# Altium PCB ProtoStack_H750VBT_altium.PcbDoc
Units mil, origin at the board's own origin, x right, y up, seen from the top; angles counter-clockwise.
Board outline 1259.84 x 4409.45 mil, 3 copper layers (Top Layer, Mid-Layer 2, Bottom Layer); 3 components, 86 nets, 186 pads, 18 vias.
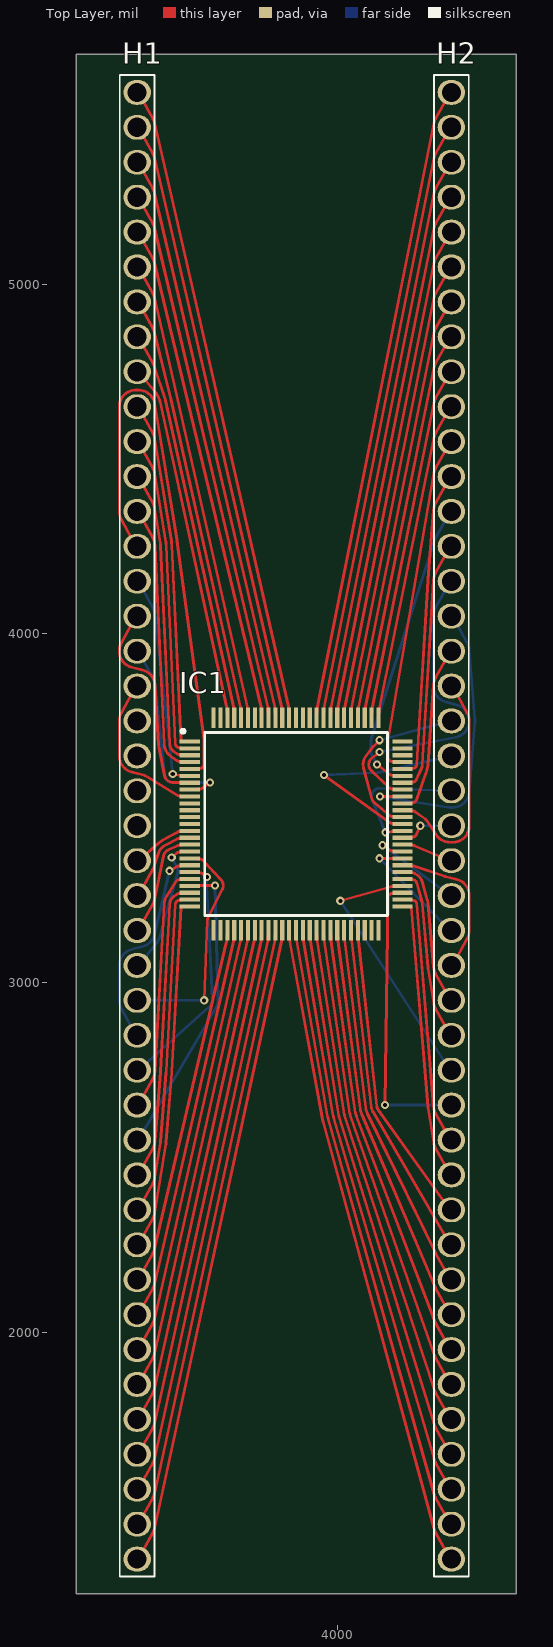
[diagram p0: Top Layer view]
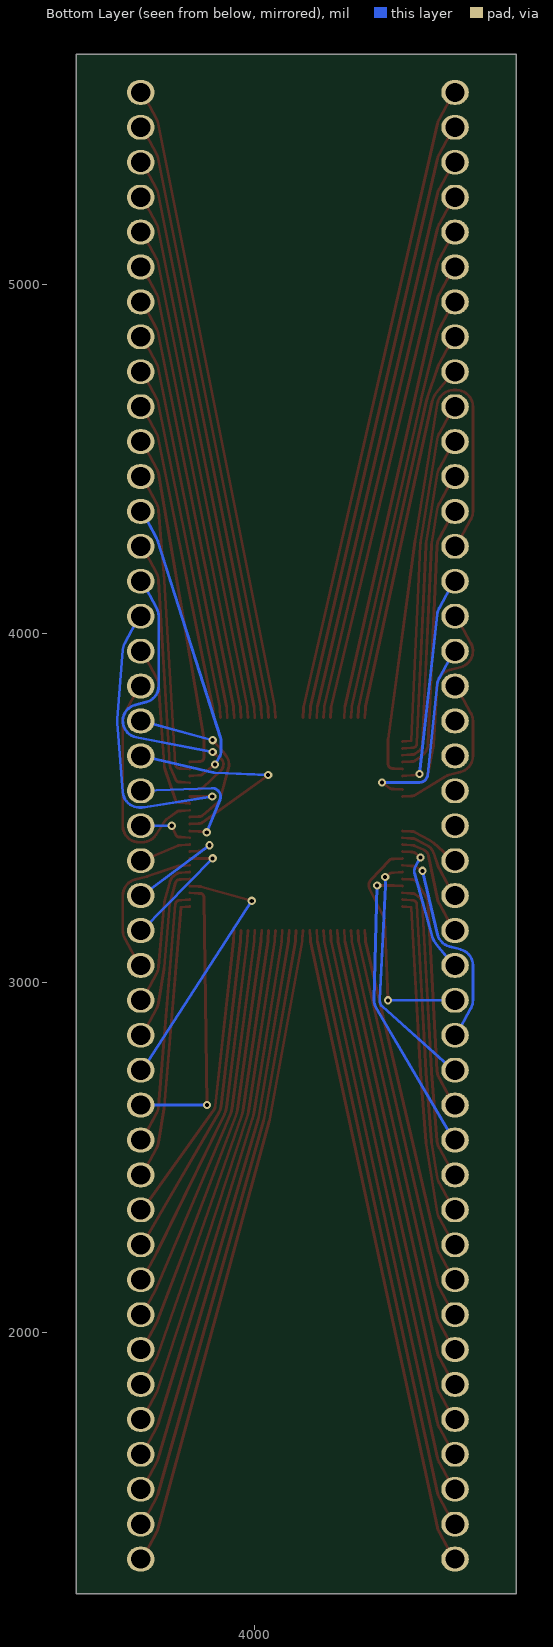
[diagram p1: Bottom Layer view, seen from below]

## Layer stack, top to bottom
Top Solder: solder mask 0.4, Solder Resist, Dk 3.5
Top Layer: signal copper 1.4
Dielectric 1: dielectric 12.6, FR-4, Dk 4.8
Mid-Layer 2: signal copper 1.4
Dielectric2: dielectric 12.6, FR-4, Dk 4.8
Bottom Layer: signal copper 1.4
Bottom Solder: solder mask 0.4, Solder Resist, Dk 3.5

## Board outline
3250.25,1250.25 3250.25,5659.7 4510.09,5659.7 4510.09,1250.25

## Design rules (kind name [scope] priority, off if disabled: settings)
Clearance [All] p1: gap=8 ignorepadtopadclearanceinfootprint=TRUE
PolygonConnect [All] p1: connectstyle=Relief reliefconductorwidth=10 reliefentries=4 polygonreliefangle="90 Angle" airgapwidth=10
RoutingVias [All] p1: holewidth=11.81 width=23.62 viastyle="Through Hole" minholewidth=11.81 minwidth=23.62 maxholewidth=11.81 maxwidth=23.62
SolderMaskExpansion [All] p1: expansion=4 istentingtop=FALSE
Width [All] p1: maxlimit=8 minlimit=8 preferedwidth=8
30 further rules are at their usual default settings.

## Components (designator, comment, footprint, x,y, rotation, side; value= is the part's Value field where it differs from the comment)
H1 "RoundedHeader" HeaderDtack_43 3425,5550 r270 top
H2 "RoundedHeader" HeaderDtack_43 4325,5550 r270 top
IC1 "STM32H750VBT6" QFP50P1600X1600X160-100N 3880.17,3454.97 r0 top

## Footprints (in the part's own frame and the unit in brackets; to place one, negate y for a bottom-side part, rotate by r counter-clockwise, add the part's x,y. Pads: shape width x height; smd on the part's side, far side on the other; paste and mask are expansions set on the pad)
HeaderDtack_43 [mm]
  oval 1.8x2 hole 1.4: 1(0,0) 2(2.54,0) 3(5.08,0) 4(7.62,0) 5(10.16,0) 6(12.7,0) 7(15.24,0) 8(17.78,0) 9(20.32,0) 10(22.86,0) 11(25.4,0) 12(27.94,0) 13(30.48,0) 14(33.02,0) 15(35.56,0) 16(38.1,0) 17(40.64,0) 18(43.18,0) 19(45.72,0) 20(48.26,0) 21(50.8,0) 22(53.34,0) 23(55.88,0) 24(58.42,0) 25(60.96,0) 26(63.5,0) 27(66.04,0) 28(68.58,0) 29(71.12,0) 30(73.66,0) 31(76.2,0) 32(78.74,0) 33(81.28,0) 34(83.82,0) 35(86.36,0) 36(88.9,0) 37(91.44,0) 38(93.98,0) 39(96.52,0) 40(99.06,0) 41(101.6,0) 42(104.14,0) 43(106.68,0)
  silkscreen extent -1.27,-1.27 107.95,1.27
QFP50P1600X1600X160-100N [mm]
  rect 1.475x0.3 smd: 1(-7.738,6) 2(-7.738,5.5) 3(-7.738,5) 4(-7.738,4.5) 5(-7.738,4) 6(-7.738,3.5) 7(-7.738,3) 8(-7.738,2.5) 9(-7.738,2) 10(-7.738,1.5) 11(-7.738,1) 12(-7.738,0.5) 13(-7.738,0) 14(-7.738,-0.5) 15(-7.738,-1) 16(-7.738,-1.5) 17(-7.738,-2) 18(-7.738,-2.5) 19(-7.738,-3) 20(-7.738,-3.5) 21(-7.738,-4) 22(-7.738,-4.5) 23(-7.738,-5) 24(-7.738,-5.5) 25(-7.738,-6) 51(7.738,-6) 52(7.738,-5.5) 53(7.738,-5) 54(7.738,-4.5) 55(7.738,-4) 56(7.738,-3.5) 57(7.738,-3) 58(7.738,-2.5) 59(7.738,-2) 60(7.738,-1.5) 61(7.738,-1) 62(7.738,-0.5) 63(7.738,0) 64(7.738,0.5) 65(7.738,1) 66(7.738,1.5) 67(7.738,2) 68(7.738,2.5) 69(7.738,3) 70(7.738,3.5) 71(7.738,4) 72(7.738,4.5) 73(7.738,5) 74(7.738,5.5) 75(7.738,6)
  rect 0.3x1.475 smd: 26(-6,-7.738) 27(-5.5,-7.738) 28(-5,-7.738) 29(-4.5,-7.738) 30(-4,-7.738) 31(-3.5,-7.738) 32(-3,-7.738) 33(-2.5,-7.738) 34(-2,-7.738) 35(-1.5,-7.738) 36(-1,-7.738) 37(-0.5,-7.738) 38(0,-7.738) 39(0.5,-7.738) 40(1,-7.738) 41(1.5,-7.738) 42(2,-7.738) 43(2.5,-7.738) 44(3,-7.738) 45(3.5,-7.738) 46(4,-7.738) 47(4.5,-7.738) 48(5,-7.738) 49(5.5,-7.738) 50(6,-7.738) 76(6,7.738) 77(5.5,7.738) 78(5,7.738) 79(4.5,7.738) 80(4,7.738) 81(3.5,7.738) 82(3,7.738) 83(2.5,7.738) 84(2,7.738) 85(1.5,7.738) 86(1,7.738) 87(0.5,7.738) 88(0,7.738) 89(-0.5,7.738) 90(-1,7.738) 91(-1.5,7.738) 92(-2,7.738) 93(-2.5,7.738) 94(-3,7.738) 95(-3.5,7.738) 96(-4,7.738) 97(-4.5,7.738) 98(-5,7.738) 99(-5.5,7.738) 100(-6,7.738)
  silkscreen extent -8.35,-6.65 6.65,6.87, body extent -8,-8 8,8, height 1.6

## Part data
H1 H2: library part HeaderStack_43
IC1: "Integrated Circuit", Manufacturer_Name=STMicroelectronics, Mouser Part Number=511-STM32H750VBT6, Arrow Part Number=STM32H750VBT6, Arrow Price/Stock=https://www.arrow.com/en/products/stm32h750vbt6/stmicroelectronics?region=nac, Datasheet Link=https://www.st.com/resource/en/datasheet/stm32h750vb.pdf, Height=1.6mm, Manufacturer_Part_Number=STM32H750VBT6, Mouser Price/Stock=https://www.mouser.co.uk/ProductDetail/STMicroelectronics/STM32H750VBT6?qs=%252BEew9%252B0nqrBAeuu%2FsQQSzQ%3D%3D

## Via types
v1: diameter 23.62, hole 11.81, Top Layer to Bottom Layer, 18 vias

## Nets (pads, with @x,y where several pads share a name; then routed paths per layer and width w, separated by ;. In a path a pad name is that pad's centre, name@x,y a point inside that pad or via, vN(x,y) a via of type N, cw(c..) or ccw(c..) an arc to the next point about the centre after c; other vN are vias at no path point)
NetC1_1: IC1.73
NetC2_2: 
NetC3_2: 
NetC4_2: IC1.48
NetH1_1: H1.1 IC1.89 | length 1849.2
  Top Layer w8: H1.1 3428.94,5550 3470.69,5472.5 cw(c3428.94,5450) 3475.17,5460.61 3858.4,3791.34 cw(c3846.71,3788.66) 3858.71,3788.66 3858.71,3784.66 IC1.89
NetH1_2: H1.2 IC1.90 | length 1747.3
  Top Layer w8: H1.2 3428.94,5450 3470.69,5372.5 cw(c3428.94,5350) 3475.15,5360.71 3838.71,3791.36 cw(c3827.02,3788.66) 3839.02,3788.66 3839.02,3784.66 IC1.90
NetH1_3: H1.3 IC1.91 | length 1645.5
  Top Layer w8: H1.3 3428.94,5350 3470.69,5272.5 cw(c3428.94,5250) 3475.12,5260.81 3819.02,3791.39 cw(c3807.34,3788.66) 3819.34,3788.66 3819.34,3784.66 IC1.91
NetH1_4: H1.4 IC1.92 | length 1543.6
  Top Layer w8: H1.4 3428.94,5250 3470.69,5172.5 cw(c3428.94,5150) 3475.09,5160.93 3799.33,3791.42 cw(c3787.65,3788.66) 3799.65,3788.66 3799.65,3784.66 IC1.92
NetH1_5: H1.5 IC1.93 | length 1441.8
  Top Layer w8: H1.5 3428.94,5150 3470.69,5072.5 cw(c3428.94,5050) 3475.06,5061.07 3779.64,3791.45 cw(c3767.97,3788.66) 3779.97,3788.66 3779.97,3784.66 IC1.93
NetH1_6: H1.6 IC1.95 | length 1335.5
  Top Layer w8: H1.6 3428.94,5050 3470.69,4972.5 cw(c3428.94,4950) 3475.2,4960.49 3740.3,3791.31 cw(c3728.6,3788.66) 3740.6,3788.66 3740.6,3784.66 IC1.95
NetH1_7: H1.7 IC1.96 | length 1233.6
  Top Layer w8: H1.7 3428.94,4950 3470.69,4872.5 cw(c3428.94,4850) 3474.98,4861.38 3521.58,4672.9 cw(c3428.94,4650) 3522.03,4671.01 3720.62,3791.3 cw(c3708.91,3788.66) 3720.91,3788.66 3720.91,3784.66 IC1.96
NetH1_8: H1.8 IC1.97 | length 1132.2
  Top Layer w8: H1.8 3428.94,4850 3470.69,4772.5 cw(c3428.94,4750) 3473.88,4765.18 3504.19,4675.42 cw(c3428.94,4650) 3506.48,4667.21 3700.94,3791.26 cw(c3689.23,3788.66) 3701.23,3788.66 3701.23,3784.66 IC1.97
NetH1_9: H1.9 IC1.98 | length 1035.7
  Top Layer w8: H1.9 3428.94,4750 3477.97,4690.24 cw(c3428.94,4650) 3490.91,4663.52 3681.27,3791.21 cw(c3669.54,3788.66) 3681.54,3788.66 3681.54,3784.66 IC1.98
NetH1_10: H1.10 IC1.1 | length 1001.9
  Top Layer w8: H1.10 3428.94,4650 3470.69,4572.5 cw(c3428.94,4550) 3475.76,4557.59 3523.14,4265.27 cw(c3428.94,4250) 3524.27,4254.45 3550.49,3693.1 IC1.1
NetH1_11: H1.11 IC1.2 | length 931.2
  Top Layer w8: H1.11 3428.94,4550 3470.69,4472.5 cw(c3428.94,4450) 3475.76,4457.59 3507.35,4262.71 cw(c3428.94,4250) 3508.29,4253.53 3534.5,3684.82 ccw(c3546.49,3685.29) 3546.49,3673.29 3550.49,3673.29 IC1.2
NetH1_12: H1.12 IC1.3 | length 856.6
  Top Layer w8: H1.12 3428.94,4450 3470.69,4372.5 cw(c3428.94,4350) 3475.76,4357.59 3491.55,4260.15 cw(c3428.94,4250) 3492.31,4252.81 3518.52,3684.03 ccw(c3546.49,3685.29) 3530.15,3662.55 3539.5,3655.85 ccw(c3546.49,3665.6) 3546.49,3653.6 3550.49,3653.6 IC1.3
NetH1_13: H1.13 IC1.4 | length 782
  Top Layer w8: H1.13 3428.94,4350 3470.69,4272.5 cw(c3428.94,4250) 3476.32,4252.11 3502.54,3683.27 ccw(c3546.49,3685.29) 3520.83,3649.54 3539.5,3636.16 ccw(c3546.49,3645.92) 3546.49,3633.92 3550.49,3633.92 IC1.4
NetH1_14: H1.14 IC1.5 | length 1654.3
  Top Layer w8: H1.14 3421.06,4250 3379.28,4327.55 cw(c3421.06,4350) 3373.63,4350 3373.63,4650 cw(c3421.06,4650) 3421.06,4697.43 3428.94,4697.43 cw(c3428.94,4650) 3475.76,4657.59 3538.93,4267.83 cw(c3428.94,4250) 3539.35,4265.03 3616.45,3698.72 cw(c3604.56,3697.1) 3616.56,3697.1 3616.56,3626.23 cw(c3604.56,3626.23) 3604.56,3614.23 3600.56,3614.23 IC1.5
NetH1_15: H1.15 IC1.6 | length 619.1
  Top Layer w8: v1(3527,3598) 3544.27,3594.75 ccw(c3546.49,3606.55) 3546.49,3594.55 3550.49,3594.55 IC1.6
  Bottom Layer w8: H1.15 3428.94,4150 3470.69,4072.5 cw(c3428.94,4050) 3476.08,4055.25 v1(3527,3598)
NetH1_16: H1.16 IC1.7 | length 613
  Top Layer w8: H1.16 3421.06,4050 3379.29,3972.47 ccw(c3421.06,3950) 3409.14,3904.09 3440.78,3895.93 cw(c3428.94,3850) 3476.28,3852.85 3486.6,3681.68 ccw(c3546.49,3685.29) 3487.65,3673.55 3503.65,3593.34 ccw(c3527,3598) 3527,3574.19 3550.49,3574.19 IC1.7
NetH1_17: H1.17 IC1.8 | length 577.7
  Top Layer w8: IC1.8 3600.56,3555.18 3604.56,3555.18 ccw(c3604.56,3567.18) 3611.69,3557.53 v1(3634,3574)
  Bottom Layer w8: H1.17 3428.94,3950 3470.69,3872.5 cw(c3428.94,3850) 3476.11,3854.95 3503.33,3595.46 ccw(c3527,3598) 3526.92,3574.19 v1(3634,3574)
NetH1_18: H1.18 IC1.9 | length 461.9
  Top Layer w8: H1.18 3421.06,3850 3379.31,3772.5 ccw(c3421.06,3750) 3373.63,3750 3373.63,3650 ccw(c3421.06,3650) 3409.16,3604.08 3440.78,3595.93 cw(c3428.94,3550) 3453.78,3590.41 3540.24,3537.25 ccw(c3546.49,3547.49) 3546.49,3535.49 3550.49,3535.49 IC1.9
NetH1_23: H1.23 IC1.14 | length 178.4
  Top Layer w8: H1.23 3428.94,3350 3487.26,3401.01 cw(c3524,3359) 3496.98,3407.84 3540.65,3431.99 cw(c3546.49,3421.51) 3546.49,3433.51 3550.49,3433.51 IC1.14
NetH1_24: H1.24 IC1.15 | length 244
  Top Layer w8: H1.24 3428.94,3250 3470.69,3327.5 ccw(c3428.94,3350) 3473.9,3334.89 3486.26,3371.68 cw(c3524,3359) 3505.8,3394.41 3541.01,3412.5 cw(c3546.49,3401.83) 3546.49,3413.83 3550.49,3413.83 IC1.15
NetH1_25: H1.25 IC1.16 | length 318.4
  Top Layer w8: H1.25 3428.94,3150 3470.69,3227.5 ccw(c3428.94,3250) 3475.41,3240.51 3500.67,3363.78 cw(c3524,3359) 3514.18,3380.69 3541.54,3393.07 cw(c3546.49,3382.14) 3546.49,3394.14 3550.49,3394.14 IC1.16
NetH1_26: H1.26 IC1.17 | length 402
  Top Layer w8: v1(3524,3359) 3538.69,3371.57 cw(c3546.49,3362.46) 3546.49,3374.46 3550.49,3374.46 IC1.17
  Bottom Layer w8: H1.26 3428.94,3050 3477.97,3109.76 ccw(c3428.94,3150) 3490.01,3132.87 3540.93,3314.43 ccw(c3518,3320.86) 3538.8,3332.46 v1(3524,3359)
NetH1_27: H1.27 IC1.18 | length 664.8
  Top Layer w8: IC1.18 3600.56,3354.77 3604.56,3354.77 cw(c3604.56,3342.77) 3613.33,3350.96 3665.4,3295.26 cw(c3648,3279) 3669.28,3268.32 3627.32,3184.75 ccw(c3638.04,3179.36) 3626.05,3179.84 v1(3617,2950)
  Bottom Layer w8: H1.27 v1(3617,2950)
NetH1_28: H1.28 IC1.19 | length 610
  Top Layer w8: v1(3518,3320.86) 3540.62,3333.55 cw(c3546.49,3323.09) 3546.49,3335.09 3550.49,3335.09 IC1.19
  Bottom Layer w8: H1.28 3421.06,2850 3379.28,2927.55 cw(c3421.06,2950) 3373.63,2950 3373.63,3050 cw(c3421.06,3050) 3409.29,3095.95 3440.78,3104.07 ccw(c3428.94,3150) 3475.1,3139.1 v1(3518,3320.86)
NetH1_29: H1.29 IC1.20 | length 704.3
  Top Layer w8: IC1.20 3600.56,3315.4 3604.56,3315.4 cw(c3604.56,3303.4) 3611.79,3312.97 v1(3625,3303)
  Bottom Layer w8: H1.29 3428.94,2750 3632.87,2932.25 ccw(c3617,2950) 3640.78,2951.21 3624.22,3277.79 cw(c3648,3279) 3624.2,3279.77 v1(3625,3303)
NetH1_30: H1.30 IC1.21 | length 706.7
  Top Layer w8: H1.30 3428.94,2650 3470.69,2727.5 ccw(c3428.94,2750) 3476.3,2747.41 3502.56,3227.15 cw(c3546.49,3224.66) 3509.51,3248.5 3536.4,3290.22 cw(c3546.49,3283.72) 3546.49,3295.72 3550.49,3295.72 IC1.21
NetH1_31: H1.31 IC1.22 | length 866.9
  Top Layer w8: IC1.22 3600.56,3279 v1(3648,3279)
  Bottom Layer w8: H1.31 3428.94,2550 3651.36,2929.89 ccw(c3617,2950) 3656.8,2951.07 v1(3648,3279)
NetH1_32: H1.32 IC1.23 | length 866
  Top Layer w8: H1.32 3428.94,2450 3470.69,2527.5 ccw(c3428.94,2550) 3476.22,2546.21 3492.17,2744.93 ccw(c3428.94,2750) 3492.28,2746.56 3518.53,3226.14 cw(c3546.49,3224.66) 3530.18,3247.42 3539.5,3254.1 cw(c3546.49,3244.35) 3546.49,3256.35 3550.49,3256.35 IC1.23
NetH1_33: H1.33 IC1.24 | length 940.7
  Top Layer w8: H1.33 3428.94,2350 3470.69,2427.5 ccw(c3428.94,2450) 3475.76,2442.41 3491.55,2539.85 ccw(c3428.94,2550) 3492.17,2544.93 3508.11,2743.62 ccw(c3428.94,2750) 3508.25,2745.66 3534.51,3225.26 cw(c3546.49,3224.66) 3546.49,3236.66 3550.49,3236.66 IC1.24
NetH1_34: H1.34 IC1.25 | length 1011.3
  Top Layer w8: H1.34 3428.94,2250 3470.69,2327.5 ccw(c3428.94,2350) 3475.76,2342.41 3491.55,2439.85 3507.33,2537.21 ccw(c3428.94,2550) 3508.12,2543.67 3524.06,2742.29 ccw(c3428.94,2750) 3524.23,2744.83 3550.49,3216.85 IC1.25
NetH1_35: H1.35 IC1.28 | length 1039.6
  Top Layer w8: H1.35 3428.94,2150 3470.69,2227.5 ccw(c3428.94,2250) 3475.12,2239.18 3681.22,3118.55 ccw(c3669.54,3121.29) 3681.54,3121.29 3681.54,3125.29 IC1.28
NetH1_36: H1.36 IC1.29 | length 1141.4
  Top Layer w8: H1.36 3428.94,2050 3470.69,2127.5 ccw(c3428.94,2150) 3475.16,2139.34 3700.92,3118.6 ccw(c3689.23,3121.29) 3701.23,3121.29 3701.23,3125.29 IC1.29
NetH1_37: H1.37 IC1.30 | length 1243.3
  Top Layer w8: H1.37 3428.94,1950 3470.69,2027.5 ccw(c3428.94,2050) 3475.19,2039.48 3720.61,3118.63 ccw(c3708.91,3121.29) 3720.91,3121.29 3720.91,3125.29 IC1.30
NetH1_38: H1.38 IC1.31 | length 1345.2
  Top Layer w8: H1.38 3428.94,1850 3470.69,1927.5 ccw(c3428.94,1950) 3475.21,1939.6 3740.31,3118.66 ccw(c3728.6,3121.29) 3740.6,3121.29 3740.6,3125.29 IC1.31
NetH1_39: H1.39 IC1.32 | length 1447.1
  Top Layer w8: H1.39 3428.94,1750 3470.69,1827.5 ccw(c3428.94,1850) 3475.24,1839.69 3759.99,3118.68 ccw(c3748.28,3121.29) 3760.28,3121.29 3760.28,3125.29 IC1.32
NetH1_40: H1.40 IC1.33 | length 1548.9
  Top Layer w8: H1.40 3428.94,1650 3470.69,1727.5 ccw(c3428.94,1750) 3475.25,1739.77 3779.69,3118.71 ccw(c3767.97,3121.29) 3779.97,3121.29 3779.97,3125.29 IC1.33
NetH1_41: H1.41 IC1.34 | length 1650.8
  Top Layer w8: H1.41 3428.94,1550 3470.69,1627.5 ccw(c3428.94,1650) 3475.27,1639.85 3799.37,3118.72 ccw(c3787.65,3121.29) 3799.65,3121.29 3799.65,3125.29 IC1.34
NetH1_42: H1.42 IC1.35 | length 1752.7
  Top Layer w8: H1.42 3428.94,1450 3470.69,1527.5 ccw(c3428.94,1550) 3475.28,1539.91 3819.06,3118.74 ccw(c3807.34,3121.29) 3819.34,3121.29 3819.34,3125.29 IC1.35
NetH1_43: H1.43 IC1.36 | length 1854.6
  Top Layer w8: H1.43 3428.94,1350 3470.69,1427.5 ccw(c3428.94,1450) 3475.3,1439.96 3838.75,3118.75 ccw(c3827.02,3121.29) 3839.02,3121.29 3839.02,3125.29 IC1.36
NetH2_1: H2.1 IC1.85 | length 1838.8
  Top Layer w8: IC1.85 3941.01,3784.66 3941.01,3788.66 cw(c3953.01,3788.66) 3941.24,3791.01 4274.55,5459.29 cw(c4321.06,5450) 4279.31,5472.5 4321.06,5550 H2.1
NetH2_2: H2.2 IC1.84 | length 1736.9
  Top Layer w8: IC1.84 3960.69,3784.66 3960.69,3788.66 cw(c3972.69,3788.66) 3960.92,3791.01 4274.55,5359.3 cw(c4321.06,5350) 4279.31,5372.5 4321.06,5450 H2.2
NetH2_3: H2.3 IC1.83 | length 1634.9
  Top Layer w8: IC1.83 3980.38,3784.66 3980.38,3788.66 cw(c3992.38,3788.66) 3980.61,3791.01 4274.55,5259.31 cw(c4321.06,5250) 4279.31,5272.5 4321.06,5350 H2.3
NetH2_4: H2.4 IC1.82 | length 1533
  Top Layer w8: IC1.82 4000.06,3784.66 4000.06,3788.66 cw(c4012.06,3788.66) 4000.29,3791.01 4274.55,5159.32 cw(c4321.06,5150) 4279.31,5172.5 4321.06,5250 H2.4
NetH2_5: H2.5 IC1.81 | length 1431.1
  Top Layer w8: IC1.81 4019.75,3784.66 4019.75,3788.66 cw(c4031.75,3788.66) 4019.98,3791.02 4274.56,5059.33 cw(c4321.06,5050) 4279.31,5072.5 4321.06,5150 H2.5
NetH2_6: H2.6 IC1.80 | length 1329.2
  Top Layer w8: IC1.80 4039.43,3784.66 4039.43,3788.66 cw(c4051.43,3788.66) 4039.67,3791.02 4274.56,4959.35 cw(c4321.06,4950) 4279.31,4972.5 4321.06,5050 H2.6
NetH2_7: H2.7 IC1.79 | length 1227.3
  Top Layer w8: IC1.79 4059.12,3784.66 4059.12,3788.66 cw(c4071.12,3788.66) 4059.35,3791.03 4274.56,4859.37 cw(c4321.06,4850) 4279.31,4872.5 4321.06,4950 H2.7
NetH2_8: H2.8 IC1.78 | length 1125.4
  Top Layer w8: IC1.78 4078.8,3784.66 4078.8,3788.66 cw(c4090.8,3788.66) 4079.04,3791.03 4274.57,4759.39 cw(c4321.06,4750) 4279.31,4772.5 4321.06,4850 H2.8
NetH2_9: H2.9 IC1.77 | length 1023.4
  Top Layer w8: IC1.77 4098.49,3784.66 4098.49,3788.66 cw(c4110.49,3788.66) 4098.73,3791.04 4274.57,4659.41 cw(c4321.06,4650) 4279.31,4672.5 4321.06,4750 H2.9
NetH2_10: H2.10 IC1.76 | length 921.4
  Top Layer w8: IC1.76 4118.3,3784.66 4274.57,4559.38 cw(c4321.06,4550) 4279.31,4572.5 4321.06,4650 H2.10
NetH2_11: H2.11 IC1.72 | length 978.5
  Top Layer w8: IC1.72 4159.78,3633.92 4155.78,3633.92 cw(c4155.78,3645.92) 4143.78,3645.92 4143.78,3697.1 cw(c4155.78,3697.1) 4143.95,3699.12 4274.33,4458.1 cw(c4321.06,4450) 4279.31,4472.5 4321.06,4550 H2.11
NetH2_12: H2.12 IC1.71 | length 888.7
  Top Layer w8: IC1.71 4209.85,3614.23 4213.85,3614.23 ccw(c4213.85,3626.23) 4225.83,3625.55 4257.75,4153.87 cw(c4321.06,4150) 4257.82,4154.95 4273.79,4353.84 cw(c4321.06,4350) 4279.31,4372.5 4321.06,4450 H2.12
NetH2_13: H2.13 IC1.70 | length 855.3
  Top Layer w8: v1(4112.01,3625.36) 4148.42,3597.07 ccw(c4155.78,3606.55) 4155.78,3594.55 4159.78,3594.55 IC1.70
  Bottom Layer w8: v1(4112.01,3625.36) 4098.37,3648.92 cw(c4119,3660.81) 4095.19,3660.81 4095.19,3695 cw(c4119,3695) 4096.3,3702.19 4275.9,4264.5 cw(c4321.06,4250) 4279.31,4272.5 4321.06,4350 H2.13
NetH2_14: H2.14 IC1.69 | length 730.8
  Top Layer w8: IC1.69 4209.85,3574.86 4213.85,3574.86 ccw(c4213.85,3586.86) 4224.82,3581.99 4239.42,3614.82 ccw(c4213.85,3626.23) 4241.81,3624.6 4273.71,4152.81 cw(c4321.06,4150) 4279.31,4172.5 4321.06,4250 H2.14
NetH2_15: H2.15 IC1.68 | length 939.9
  Top Layer w8: v1(4119,3660.81) 4097.48,3644.22 ccw(c4112.01,3625.36) 4095.56,3608.15 4147.51,3558.49 ccw(c4155.78,3567.18) 4155.78,3555.18 4159.78,3555.18 IC1.68
  Bottom Layer w8: v1(4119,3660.81) 4338,3703.44 ccw(c4328.94,3750) 4340.78,3795.93 4309.17,3804.08 cw(c4321.06,3850) 4273.63,3850 4273.63,4050 cw(c4321.06,4050) 4279.31,4072.5 4321.06,4150 H2.15
NetH2_16: H2.16 IC1.67 | length 867
  Top Layer w8: v1(4120.19,3533.71) IC1.67
  Bottom Layer w8: v1(4120.19,3533.71) 4313.66,3503.15 ccw(c4321.06,3550) 4321.06,3502.57 4328.94,3502.57 ccw(c4328.94,3550) 4376.22,3546.21 4392.17,3744.93 ccw(c4328.94,3750) 4392.17,3755.07 4376.22,3953.79 ccw(c4328.94,3950) 4370.69,3972.5 4328.94,4050 H2.16
NetH2_17: H2.17 IC1.66 | length 491.4
  Top Layer w8: IC1.66 4209.85,3515.81 4213.85,3515.81 ccw(c4213.85,3527.81) 4225.2,3523.91 4255.46,3611.93 ccw(c4213.85,3626.23) 4257.75,3623.18 4273.74,3853.29 cw(c4321.06,3850) 4279.31,3872.5 4321.06,3950 H2.17
NetH2_18: H2.18 IC1.65 | length 672.6
  Top Layer w8: IC1.65 4209.85,3492.57 4213.85,3492.57 cw(c4213.85,3480.57) 4220.88,3490.29 4249.94,3469.3 cw(c4236,3450) 4255.94,3463.01 4281.34,3424.08 ccw(c4321.06,3450) 4321.06,3402.57 4328.94,3402.57 ccw(c4328.94,3450) 4376.37,3450 4376.37,3750 ccw(c4328.94,3750) 4370.69,3772.5 4328.94,3850 H2.18
NetH2_19: H2.19 IC1.64 | length 508.5
  Top Layer w8: v1(4119,3695) 4101.91,3677.4 ccw(c4119,3660.81) 4100.12,3675.32 4080.4,3649.56 ccw(c4112.01,3625.36) 4073.56,3615.04 4097.19,3527.54 ccw(c4120.19,3533.71) 4104.87,3515.48 4148.07,3479.24 ccw(c4155.78,3488.44) 4155.78,3476.44 4159.78,3476.44 IC1.64
  Bottom Layer w8: v1(4119,3695) 4321.06,3750 H2.19
NetH2_20: H2.20 IC1.63 | length 640
  Top Layer w8: v1(3960,3595) 4139.41,3465.72 ccw(c4155.78,3488.44) 4139.47,3465.68 4148.79,3459 ccw(c4155.78,3468.75) 4155.78,3456.75 4159.78,3456.75 IC1.63
  Bottom Layer w8: v1(3960,3595) 4113.07,3601.57 ccw(c4112.01,3625.36) 4117.46,3602.18 4321.06,3650 H2.20
NetH2_21: H2.21 IC1.62 | length 401.7
  Top Layer w8: v1(4136,3431) 4154.21,3433.41 cw(c4155.78,3421.51) 4155.78,3433.51 4159.78,3433.51 IC1.62
  Bottom Layer w8: v1(4136,3431) 4098.09,3524.84 cw(c4120.19,3533.71) 4121.08,3557.51 4321.06,3550 H2.21
NetH2_22: H2.22 IC1.61 | length 159.8
  Top Layer w8: IC1.61 4209.85,3417.38 4213.85,3417.38 ccw(c4213.85,3429.38) 4224.84,3424.56 v1(4236,3450)
  Bottom Layer w8: v1(4236,3450) H2.22
NetH2_23: H2.23 IC1.60 | length 149.1
  Top Layer w8: IC1.60 4209.85,3394.14 4213.85,3394.14 cw(c4213.85,3382.14) 4218.51,3393.2 4321.06,3350 H2.23
NetH2_24: H2.24 IC1.59 | length 306.3
  Top Layer w8: v1(4128,3394) 4149.19,3379.99 ccw(c4155.78,3390.01) 4155.78,3378.01 4159.78,3378.01 IC1.59
  Bottom Layer w8: v1(4128,3394) 4321.06,3250 H2.24
NetH2_25: H2.25 IC1.58 | length 358.7
  Top Layer w8: v1(4119,3356.55) IC1.58
  Bottom Layer w8: v1(4119,3356.55) 4321.06,3150 H2.25
NetH2_26: H2.26 IC1.57 | length 440
  Top Layer w8: IC1.57 4209.85,3335.09 4213.85,3335.09 cw(c4213.85,3323.09) 4217.65,3334.47 4306.13,3304.98 ccw(c4321.06,3350) 4309.16,3304.08 4340.78,3295.93 cw(c4328.94,3250) 4376.37,3250 4376.37,3150 cw(c4328.94,3150) 4370.69,3127.5 4328.94,3050 H2.26
NetH2_27: H2.27 IC1.56 | length 426.6
  Top Layer w8: IC1.56 4209.85,3315.4 4213.85,3315.4 cw(c4213.85,3303.4) 4220.84,3313.15 4230.16,3306.48 cw(c4213.85,3283.72) 4240.81,3291.3 4256.21,3236.58 cw(c4213.85,3224.66) 4257.68,3228.51 4273.81,3045.91 ccw(c4321.06,3050) 4279.28,3027.55 4321.06,2950 H2.27
NetH2_28: H2.28 IC1.55 | length 501.2
  Top Layer w8: IC1.55 4209.85,3295.72 4213.85,3295.72 cw(c4213.85,3283.72) 4225.4,3286.97 4240.81,3232.25 cw(c4213.85,3224.66) 4241.75,3227.03 4257.88,3044.38 ccw(c4321.06,3050) 4258.44,3039.88 4274.24,2942.41 ccw(c4321.06,2950) 4279.28,2927.55 4321.06,2850 H2.28
NetH2_29: H2.29 IC1.54 | length 765.2
  Top Layer w8: v1(4007,3235) 4152.56,3275.59 cw(c4155.78,3264.03) 4155.78,3276.03 4159.78,3276.03 IC1.54
  Bottom Layer w8: v1(4007,3235) 4321.06,2750 H2.29
NetH2_30: H2.30 IC1.53 | length 832.4
  Top Layer w8: v1(4135,2650) 4143.78,3244.52 cw(c4155.78,3244.35) 4155.78,3256.35 4159.78,3256.35 IC1.53
  Bottom Layer w8: v1(4135,2650) H2.30
NetH2_31: H2.31 IC1.52 | length 740
  Top Layer w8: IC1.52 4209.85,3236.66 4213.85,3236.66 cw(c4213.85,3224.66) 4225.81,3225.65 4273.79,2646.1 ccw(c4321.06,2650) 4279.28,2627.55 4321.06,2550 H2.31
NetH2_32: H2.32 IC1.51 | length 810.7
  Top Layer w8: IC1.51 4209.85,3216.85 4257.86,2644.65 ccw(c4321.06,2650) 4258.45,2639.85 4274.24,2542.41 ccw(c4321.06,2550) 4279.28,2527.55 4321.06,2450 H2.32
NetH2_33: H2.33 IC1.47 | length 874.2
  Top Layer w8: IC1.47 4059.12,3125.29 4059.12,3121.29 ccw(c4071.12,3121.29) 4059.18,3120.02 4111.33,2647.37 ccw(c4135,2650) 4115.62,2636.17 4321.06,2350 H2.33
NetH2_34: H2.34 IC1.46 | length 967.9
  Top Layer w8: IC1.46 4039.43,3125.29 4039.43,3121.29 ccw(c4051.43,3121.29) 4039.51,3119.89 4095.47,2645.28 ccw(c4135,2650) 4100.53,2630.08 4321.06,2250 H2.34
NetH2_35: H2.35 IC1.45 | length 1064.4
  Top Layer w8: IC1.45 4019.75,3125.29 4019.75,3121.29 ccw(c4031.75,3121.29) 4019.84,3119.8 4079.64,2642.95 ccw(c4135,2650) 4084.82,2625.57 4278.44,2229.18 ccw(c4321.06,2250) 4279.28,2227.55 4321.06,2150 H2.35
NetH2_36: H2.36 IC1.44 | length 1162.7
  Top Layer w8: IC1.44 4000.06,3125.29 4000.06,3121.29 ccw(c4012.06,3121.29) 4000.17,3119.71 4063.81,2640.54 ccw(c4135,2650) 4068.92,2621.89 4277.45,2131.36 ccw(c4321.06,2150) 4279.28,2127.55 4321.06,2050 H2.36
NetH2_37: H2.37 IC1.43 | length 1262.1
  Top Layer w8: IC1.43 3980.38,3125.29 3980.38,3121.29 ccw(c3992.38,3121.29) 3980.49,3119.65 4048.06,2637.69 ccw(c4135,2650) 4052.99,2618.61 4276.78,2033.01 ccw(c4321.06,2050) 4279.28,2027.55 4321.06,1950 H2.37
NetH2_38: H2.38 IC1.42 | length 1362.1
  Top Layer w8: IC1.42 3960.69,3125.29 3960.69,3121.29 ccw(c3972.69,3121.29) 3960.82,3119.56 4032.32,2634.73 ccw(c4135,2650) 4037.02,2615.7 4276.34,1934.2 ccw(c4321.06,1950) 4279.28,1927.55 4321.06,1850 H2.38
NetH2_39: H2.39 IC1.41 | length 1462.6
  Top Layer w8: IC1.41 3941.01,3125.29 3941.01,3121.29 ccw(c3953.01,3121.29) 3941.14,3119.49 4016.6,2631.69 ccw(c4135,2650) 4021.12,2612.76 4275.99,1835.23 ccw(c4321.06,1850) 4279.28,1827.55 4321.06,1750 H2.39
NetH2_40: H2.40 IC1.40 | length 1563.4
  Top Layer w8: IC1.40 3921.32,3125.29 3921.32,3121.29 ccw(c3933.32,3121.29) 3921.47,3119.38 4000.94,2628.24 ccw(c4135,2650) 4005.23,2609.95 4275.76,1735.93 ccw(c4321.06,1750) 4279.28,1727.55 4321.06,1650 H2.40
NetH2_41: H2.41 IC1.39 | length 1664.4
  Top Layer w8: IC1.39 3901.64,3125.29 3901.64,3121.29 ccw(c3913.64,3121.29) 3901.8,3119.29 3985.33,2624.57 ccw(c4135,2650) 3989.39,2607.06 4275.59,1636.49 ccw(c4321.06,1650) 4279.28,1627.55 4321.06,1550 H2.41
NetH2_42: H2.42 IC1.38 | length 1765.6
  Top Layer w8: IC1.38 3881.95,3125.29 3881.95,3121.29 ccw(c3893.95,3121.29) 3882.13,3119.24 3969.72,2620.95 ccw(c4135,2650) 3973.49,2604.43 4275.42,1537.09 ccw(c4321.06,1550) 4279.28,1527.55 4321.06,1450 H2.42
NetH2_43: H2.43 IC1.37 | length 1866.9
  Top Layer w8: IC1.37 3862.27,3125.29 3862.27,3121.29 ccw(c3874.27,3121.29) 3862.45,3119.18 3954.2,2616.85 ccw(c4135,2650) 3957.69,2601.56 4275.32,1437.44 ccw(c4321.06,1450) 4279.28,1427.55 4321.06,1350 H2.43
pads on no net: H1.19 H1.20 H1.21 H1.22 IC1.10 IC1.11 IC1.12 IC1.13 IC1.26 IC1.27 IC1.49 IC1.50 IC1.74 IC1.75 IC1.86 IC1.87 IC1.88 IC1.94 IC1.99 IC1.100

## Silkscreen, mask and mechanical layers (free items; w line width, h text height)
Draft:
  lines w0.5: 3250.25,1250.25 3250.25,5659.7 4510.09,5659.7 4510.09,1250.25 3250.25,1250.25 ; 3407.73,1525.84 3407.73,5384.11 4352.61,5384.11 4352.61,1525.84 3407.73,1525.84
  lines w5: 3250.25,3454.97 4510.09,3454.97 ; 3880.17,1250.25 3880.17,5659.7